# Altium PCB AHD PCB R2.4.PcbDoc (part 1 of 2)
Units mil, origin at the board's own origin, x right, y up, seen from the top; angles counter-clockwise.
Board outline 4500 x 2100 mil, 4 copper layers (Top Layer Signals, Ground Plane, Power Plane, Bottom Layer Signals); 162 components, 142 nets, 631 pads, 242 vias.
Unrouted connection lines stored in the file: 1.
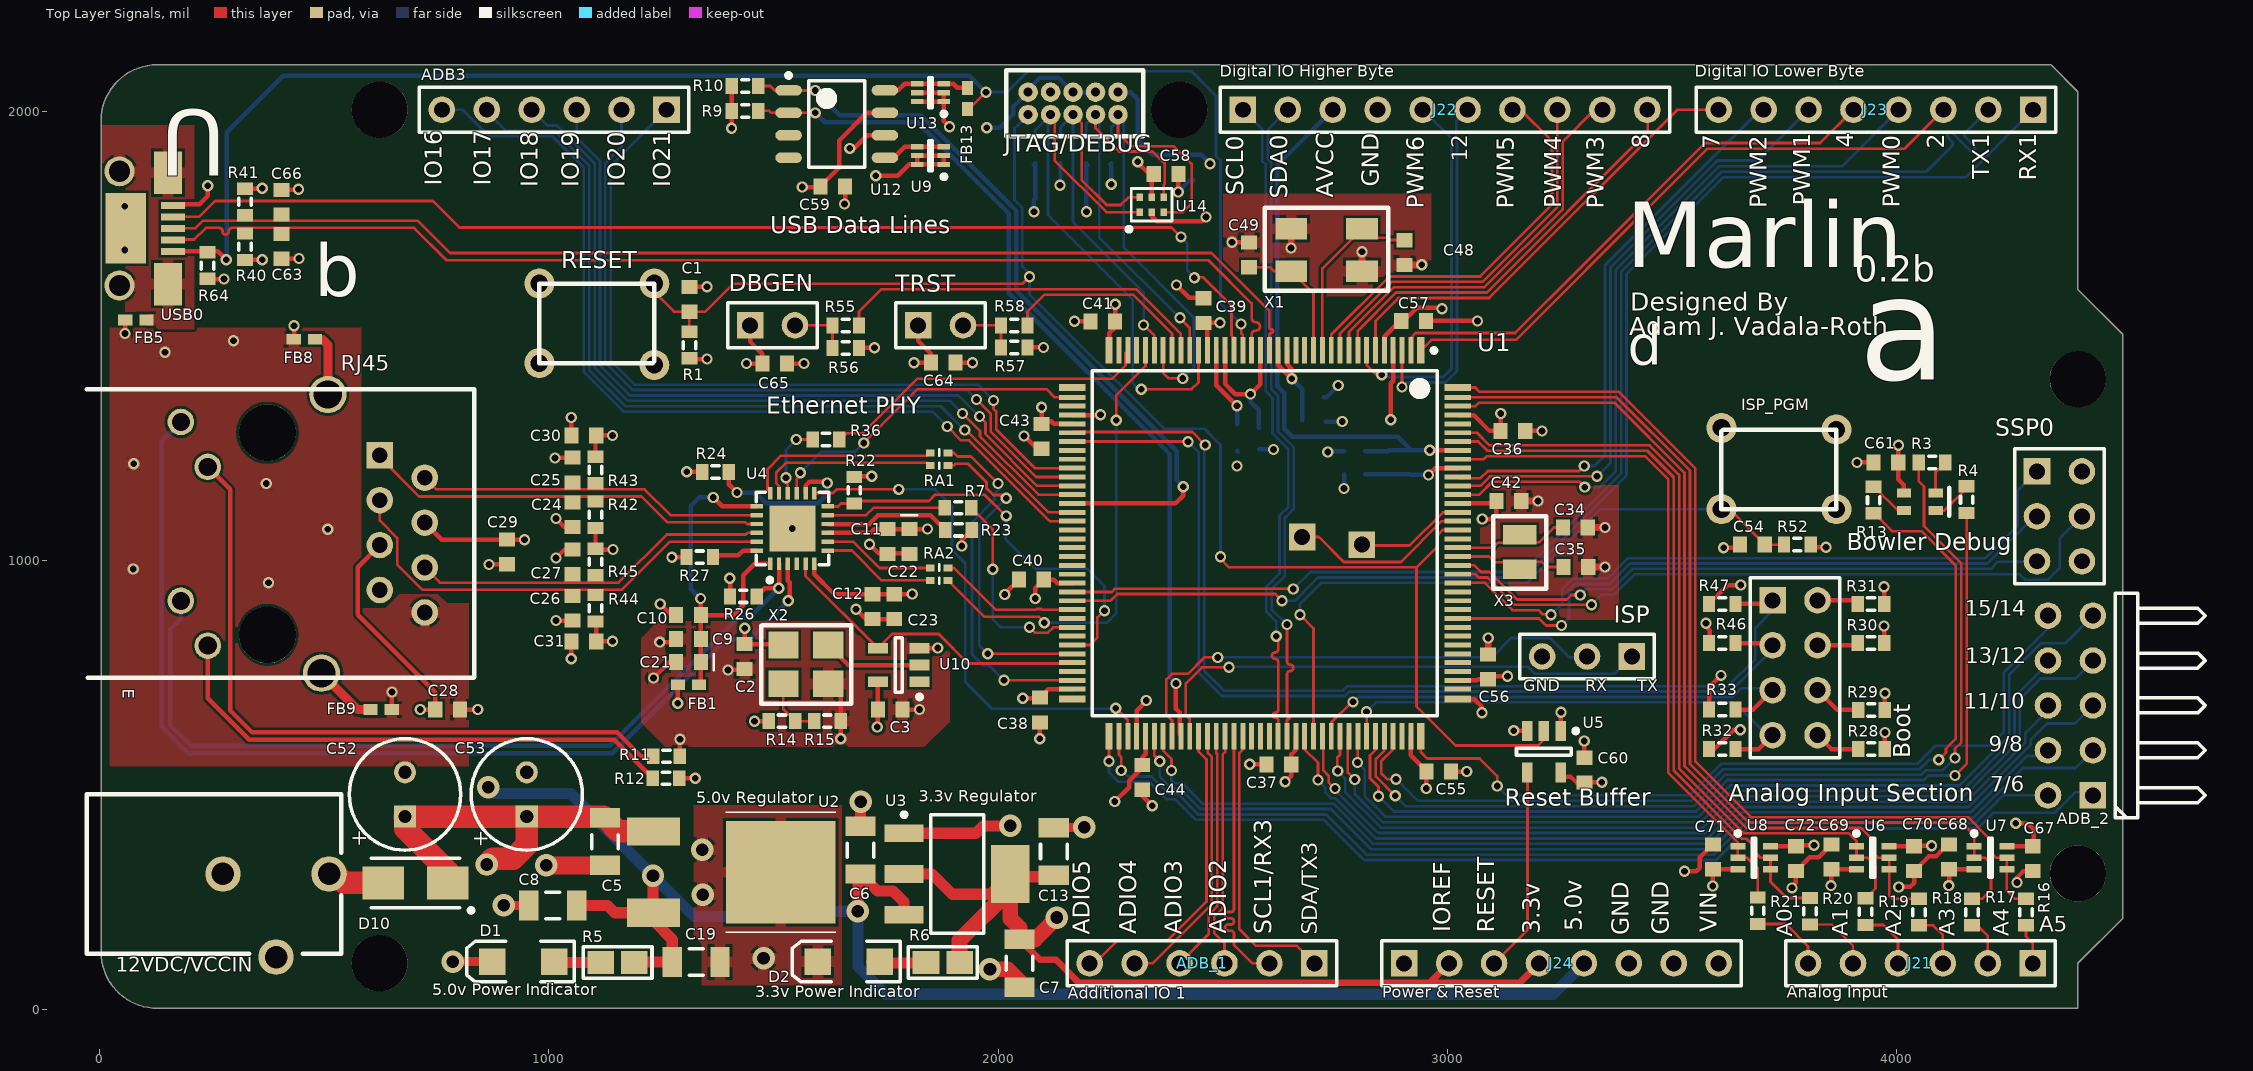
[diagram p0: Top Layer Signals view]
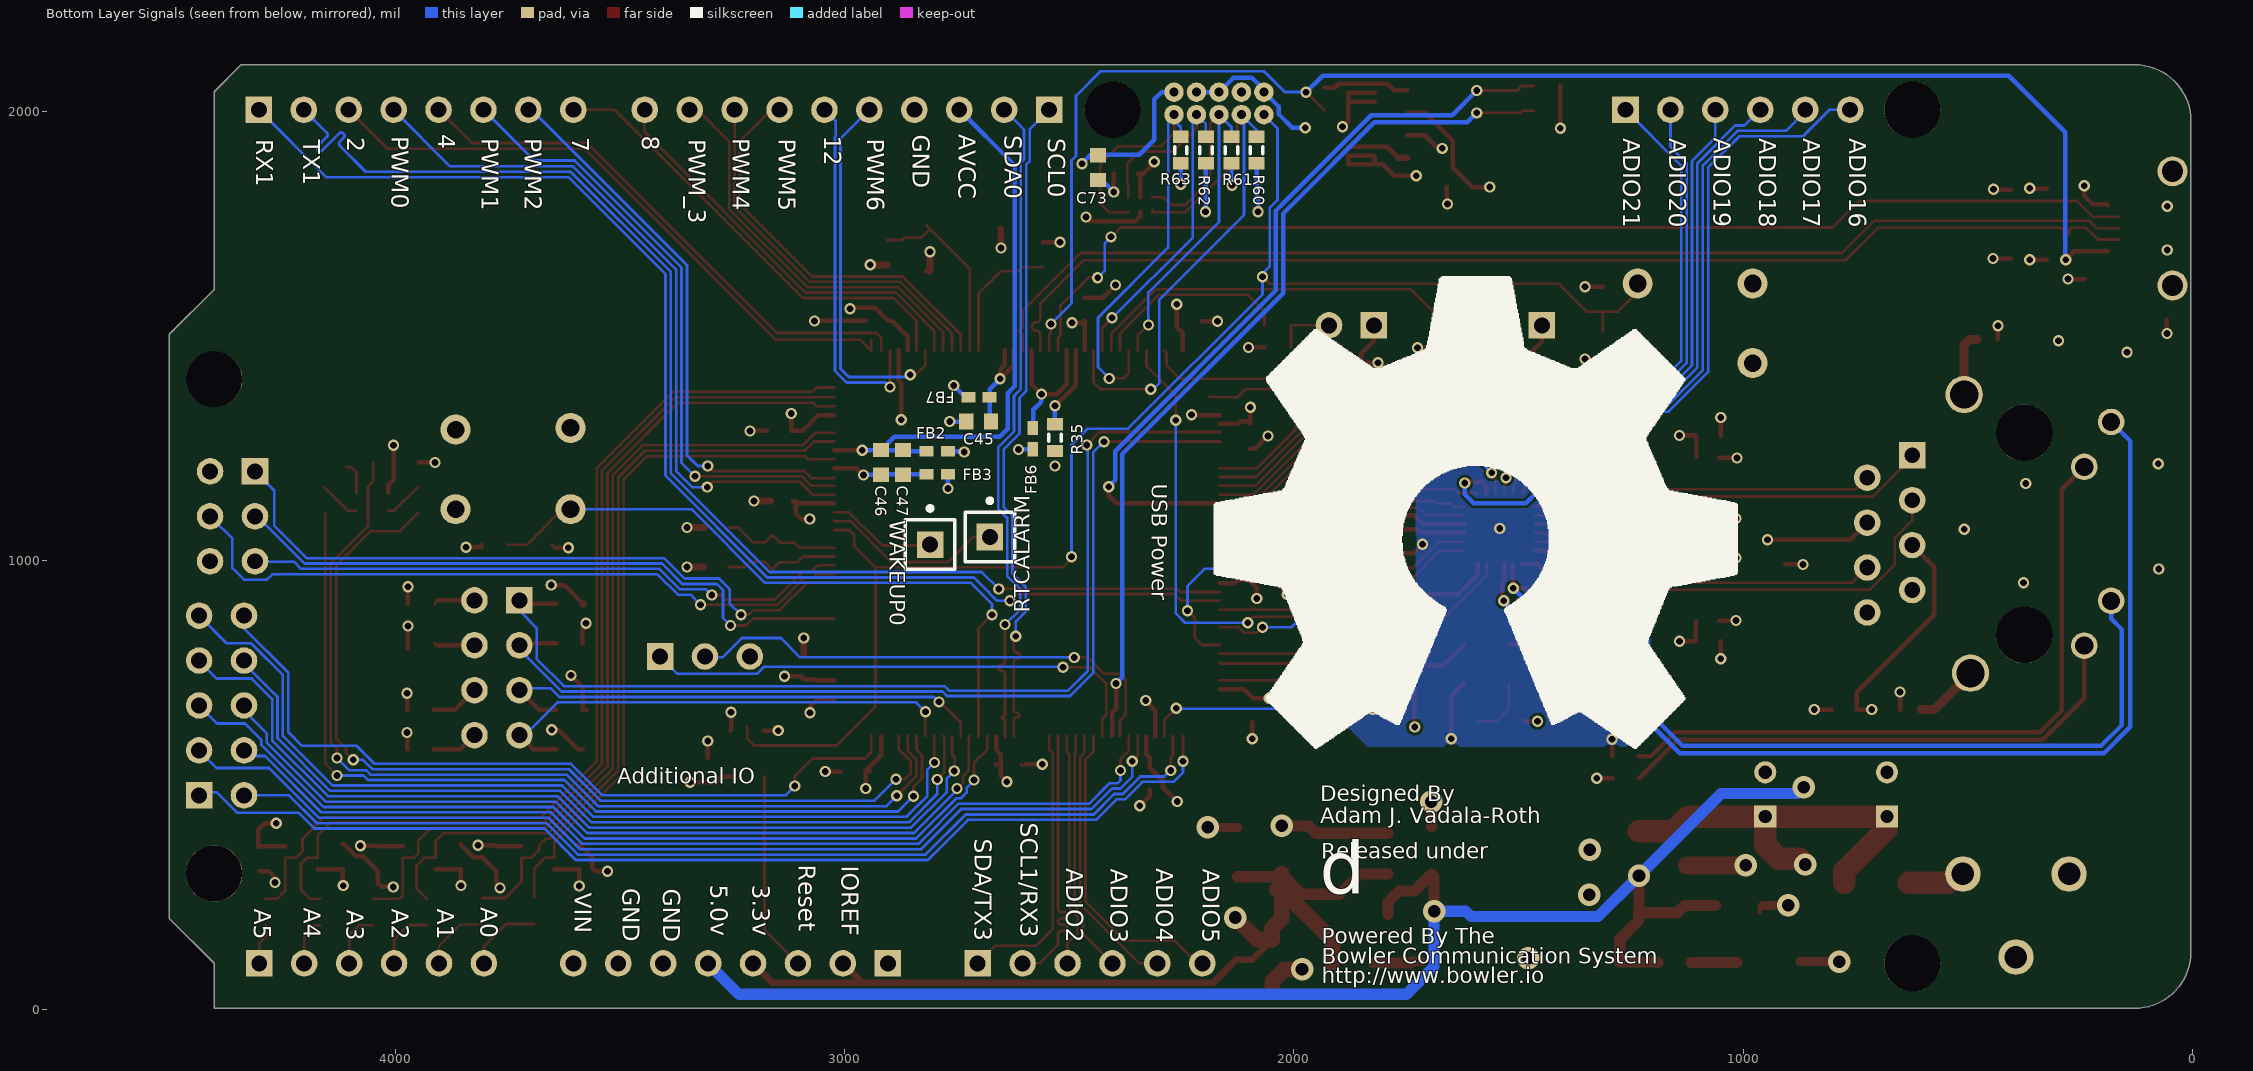
[diagram p1: Bottom Layer Signals view, seen from below]
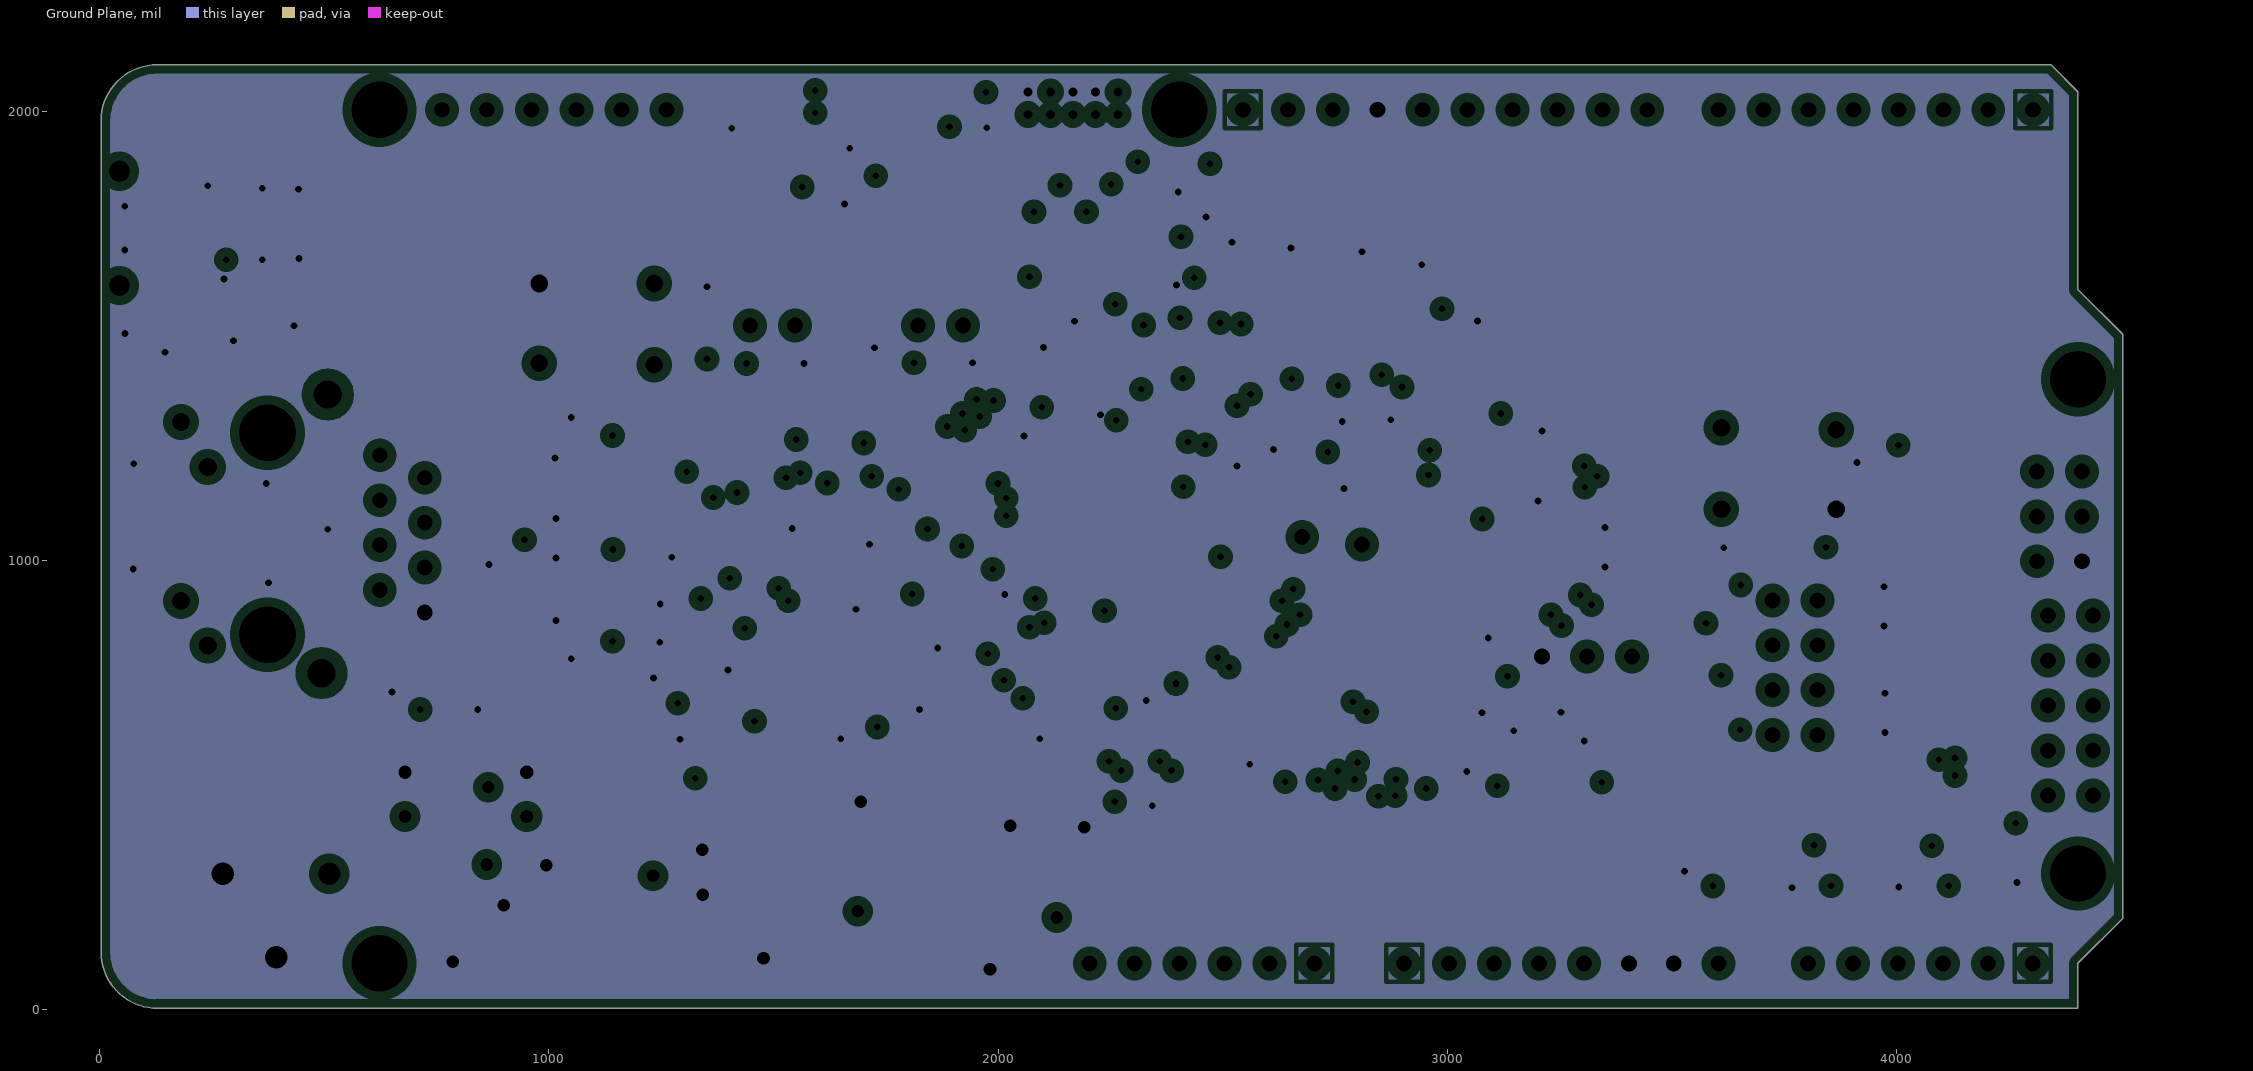
[diagram p2: Ground Plane, clearances drawn from the general rule]
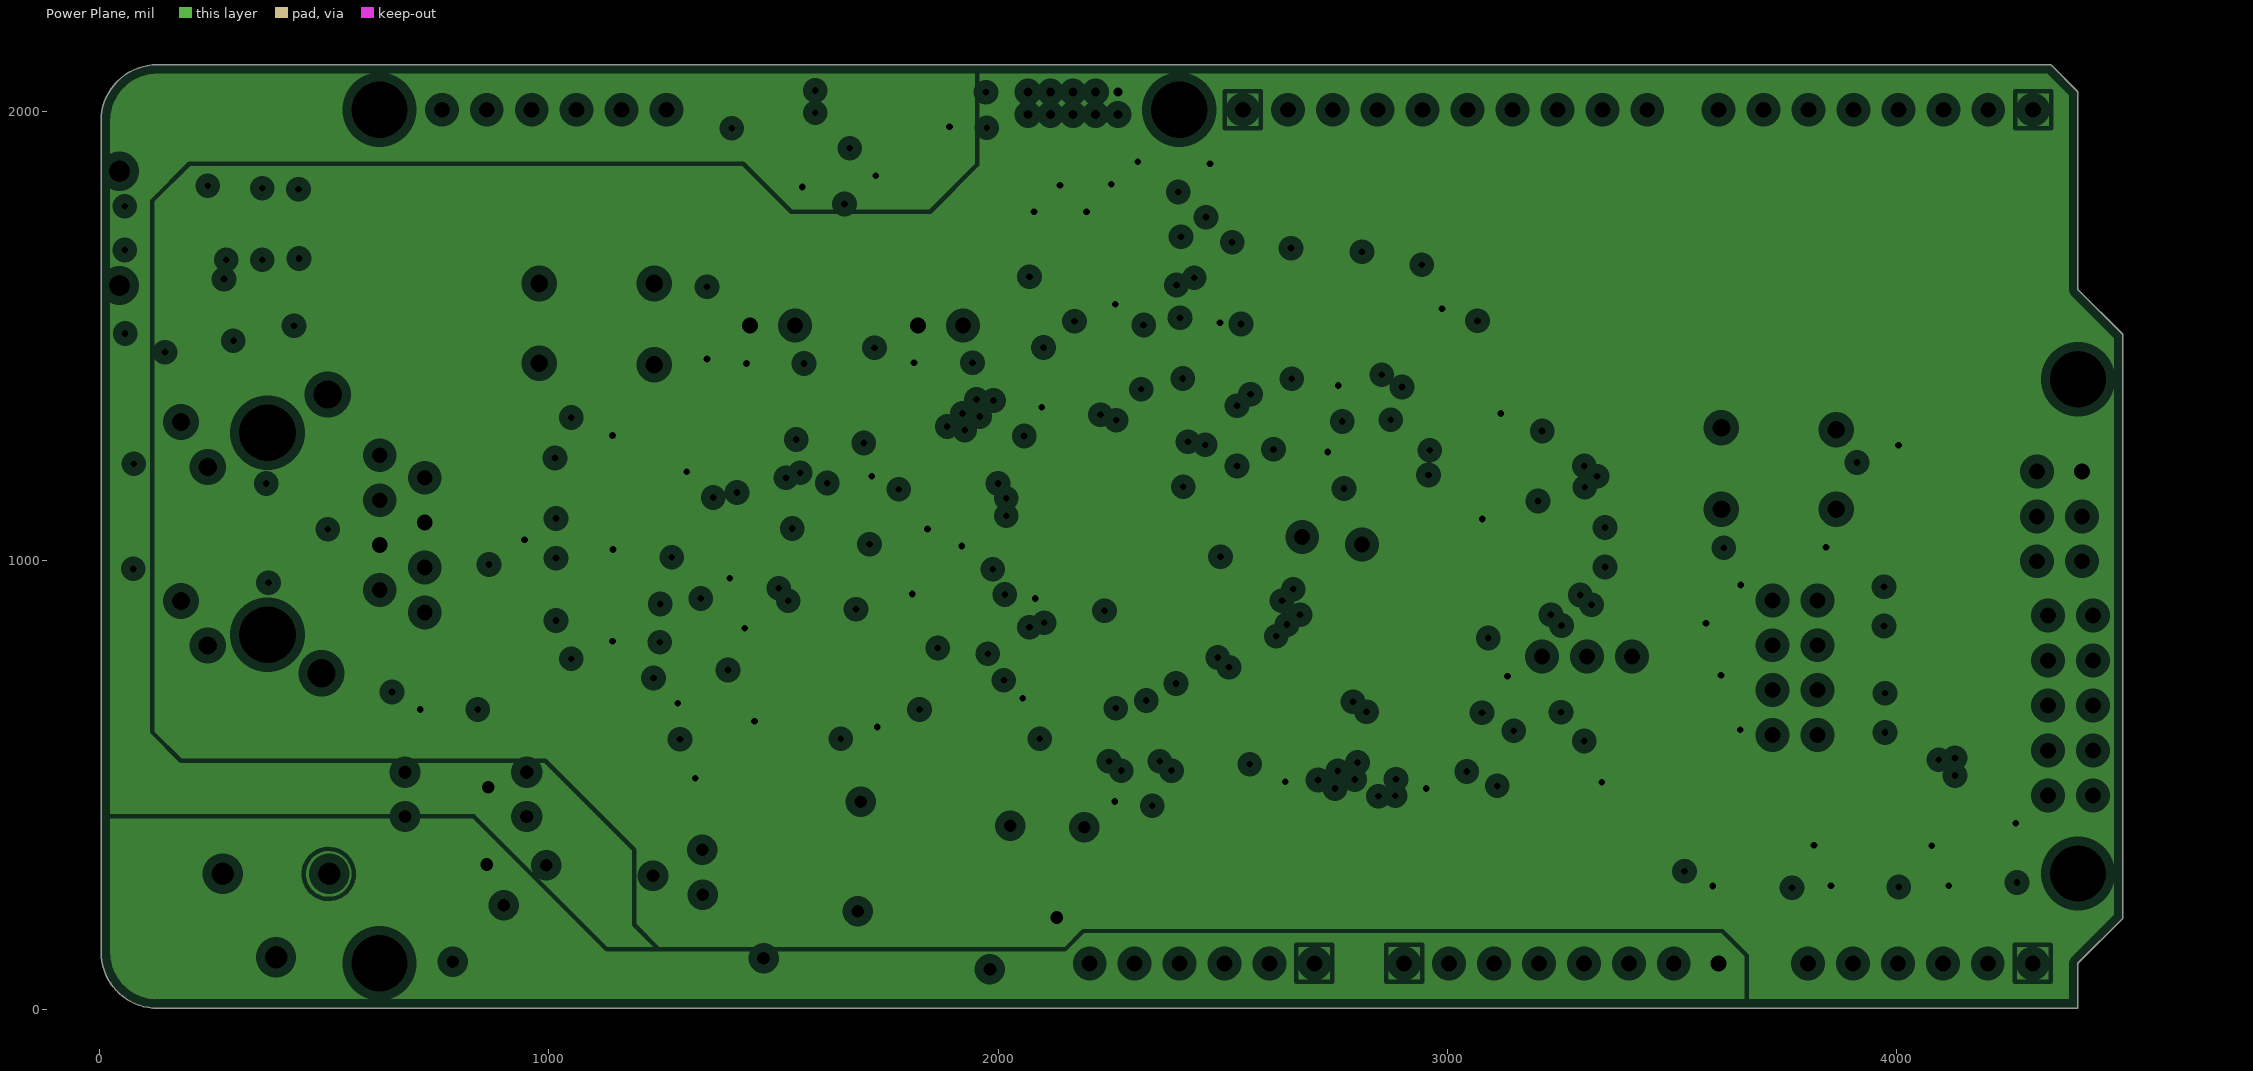
[diagram p3: Power Plane, clearances drawn from the general rule]

## Layer stack, top to bottom
Top Layer Signals: signal copper 1.4
Dielectric: core 12.6, FR-4, Dk 4.8
Ground Plane: plane copper 1.4, net GND
Dielectric: prepreg 12.6, FR-4, Dk 4.8
Power Plane: plane copper 1.4, net (Multiple Nets)
Dielectric: core 12.6, FR-4, Dk 4.8
Bottom Layer Signals: signal copper 1.4

## Board outline
3.45,128.1 ccw(c128.45,128.1) 128.45,3.1 4403.45,3.1 4403.45,103.1 4503.45,203.1 4503.45,1503.1 4403.45,1603.1 4403.45,2043.1 4343.45,2103.1 128.45,2103.1 ccw(c128.45,1978.1) 3.45,1978.1

## Design rules (kind name [scope] priority, off if disabled: settings)
Clearance [All] p1: gap=6
DiffPairsRouting "RXD To MAC" [(InNet('ENET_RXD0') OR InNet('ENET_RXD1'))] p1: maxlimit=10 minlimit=10 mostfreqgap=10 maxuncoupledlength=500
DiffPairsRouting "USB0 Differential Pair" [(InNet('USB0_DM') AND InNet('USB0__DP'))] p2: maxlimit=10 minlimit=10 mostfreqgap=10 maxuncoupledlength=500
DiffPairsRouting [All] p3: maxlimit=10 minlimit=10 mostfreqgap=10 maxuncoupledlength=500
HoleSize [All] p1: absolutevalues=TRUE maxlimit=100 minlimit=15 maxpercent=80.000 minpercent=20.000
MatchedLengths ISP_U0 [(InNet('FDTI_TX') OR InNet('FTDI_RX'))] p1: tolerance=0 checknetsindiffpair=TRUE checkdiffpairvsdiffpair=TRUE checkothers=TRUE
MatchedLengths Arduino_UTXRX [(InNet('GPIO1_6_TXD') OR InNet('GPIO1_7_RXD'))] p2: tolerance=0 checknetsindiffpair=TRUE checkdiffpairvsdiffpair=TRUE checkothers=TRUE
MatchedLengths I2C0 [(InNet('A4_SDA') OR InNet('A5_SCL'))] p3: tolerance=0 checknetsindiffpair=TRUE checkdiffpairvsdiffpair=TRUE checkothers=TRUE
MatchedLengths I2C_1_U3 [(InNet('ADD_0') OR InNet('ADD_1'))] p4: tolerance=0 checknetsindiffpair=TRUE checkdiffpairvsdiffpair=TRUE checkothers=TRUE
MatchedLengths ENET_TX [(InNet('ENET_TXD0') OR InNet('ENET_TXD1'))] p5: tolerance=0 checknetsindiffpair=TRUE checkdiffpairvsdiffpair=TRUE checkothers=TRUE // ENET Mac TX
MatchedLengths ENET_RX [(InNet('ENET_RXD0') OR InNet('ENET_RXD1'))] p6: tolerance=0 checknetsindiffpair=TRUE checkdiffpairvsdiffpair=TRUE checkothers=TRUE // ENET Mac RX
MatchedLengths USB0 [(InNet('USB0_P') OR InNet('USB0_N'))] p7: tolerance=0 checknetsindiffpair=TRUE checkdiffpairvsdiffpair=TRUE checkothers=TRUE // USB0 DP and DM
ParallelSegment [(InNet('USB0_DM') OR InNet('USB0_VBUS') OR InNet('USB0__DP') OR InNet('USB0__ID'))] p1: limit=10000 gap=10
PlaneClearance [All] p1: clearance=20
PlaneConnect PlaneConnect_3 [(InNet('VCC_3.3V') AND InComponent('TRST'))] p1: planeconnectstyle=NoConnect reliefexpansion=20 reliefentries=4 reliefconductorwidth=10 reliefairgap=10
PlaneConnect PlaneConnect_2 [(InNet('VCC_3.3V') AND InComponent('DBGEN'))] p2: planeconnectstyle=NoConnect reliefexpansion=20 reliefentries=4 reliefconductorwidth=10 reliefairgap=10
PlaneConnect PlaneConnect_1 [(InNet('VCC_3.3V') AND InComponent('RJ45'))] p3: planeconnectstyle=NoConnect reliefexpansion=20 reliefentries=4 reliefconductorwidth=10 reliefairgap=10
PlaneConnect VCC5V [InNet('VCC_5V')] p4: planeconnectstyle=Relief reliefexpansion=20 reliefentries=4 reliefconductorwidth=25 reliefairgap=10
PlaneConnect VCCIN [InNet('VCC_IN')] p5: planeconnectstyle=Relief reliefexpansion=20 reliefentries=4 reliefconductorwidth=25 reliefairgap=10
PlaneConnect "JTAG VCC3.3" [(InNet('VCC_3.3V') AND InComponent('JTAG/DEBUG'))] p6: planeconnectstyle=NoConnect reliefexpansion=20 reliefentries=2 reliefconductorwidth=50 reliefairgap=0
PlaneConnect "JTAG GND" [(InNet('GND') AND InComponent('JTAG/DEBUG'))] p7: planeconnectstyle=NoConnect reliefexpansion=20 reliefentries=4 reliefconductorwidth=10 reliefairgap=10
PlaneConnect [All] p8: planeconnectstyle=Relief reliefexpansion=20 reliefentries=4 reliefconductorwidth=15 reliefairgap=10
PolygonConnect [All] p1: connectstyle=Relief reliefconductorwidth=25 reliefentries=4 polygonreliefangle="90 Angle" airgapwidth=10
RoutingVias [All] p1: holewidth=10 width=15 viastyle="Through Hole" minholewidth=10 minwidth=15 maxholewidth=10 maxwidth=15
SilkToSolderMaskClearance SilkscreenOverComponentPads [IsPad] p1: minsilkscreentomaskgap=10 clearancetoexposedcopper=TRUE
SolderMaskExpansion [All] p1: expansion=4
Width [All] p1 off: maxlimit=6 minlimit=6 preferedwidth=6
23 further rules are at their usual default settings.

## Classes and differential pairs
component class "Arduino Header Breakout": C60 C67 C68 C69 C70 C71 C72 J21 J22 J23 J24 R16 R17 R18 R19 R20 R21 SSP0 U5 U6 U7 U8
component class "Bowler Debug LED": "Bowler Debug" "Bowler Status" C61 R3 R4 R13
component class "Crystal / Reset / Boot": Boot "Boot Mode" C1 C34 C35 C48 C49 C58 C64 C65 C73 DBGEN JTAG/DEBUG P16 R1 R28 R29 R30 R31 R32 R33 R46 R47 R55 R56 R57 R58 R60 R61 R62 R63 Reset RTCALARM TRST U14 WAKEUP0 X1 X3
component class Ethernet: C2 C3 C9 C10 C11 C12 C21 C22 C23 C24 C25 C26 C27 C28 C29 C30 C31 FB1 FB8 FB9 R7 R11 R12 R14 R15 R22 R23 R24 R26 R27 R36 R42 R43 R44 R45 RA1 RA2 RJ45 U4 U10 X2
component class "Power Electronics": 12VDC/VCCIN C5 C6 C7 C8 C13 C19 C46 C47 C52 C53 D1 D2 D10 FB2 FB3 J14 R5 R6 U2 U3
component class "USB Section": C45 C59 C63 C66 FB5 FB6 FB7 FB13 R9 R10 R35 R40 R41 R64 Text U9 U12 U13 USB0
component class "Main Controller LPC4330FBD144": ADB3 C36 C37 C38 C39 C40 C41 C42 C43 C44 C54 C55 C56 C57 ISP "ISP TX RX" ISP_PGM R52 U1
component class "Additional Breakout Headers": ADB_1 ADB_2
differential pair RX: +RX_P -RX_N
differential pair TX: +TX_P -TX_N
differential pair ENET_RXD: +ENET_RXD_P -ENET_RXD_N
differential pair ENET_TXD: +ENET_TXD_P -ENET_TXD_N
differential pair RA1: +RA1_P -RA1_N
differential pair RA2: +RA2_P -RA2_N
differential pair USB0: +USB0_P -USB0_N

## Components (designator, comment, footprint, x,y, rotation, side; value= is the part's Value field where it differs from the comment)
12VDC/VCCIN "Center-positive 2.1 mm power jack" PJ-102AH 511,302 r90 top (schematic designator J14)
ADB3 "Header 6" HDR1X6 1262,2003 r180 top locked
ADB_1 "Header 6" HDR1X6 2704,103 r180 top locked
ADB_2 "Header 5X2H" HDR2X5H 4437,477 r90 top locked
Boot "Header 4X2" HDR2X4 3724,911 r270 top
"Bowler Debug" "APTF1616SEEZGQBDC" "RGB LED APTF1616SEEZGQBDC" 4087,1150 r180 top (schematic designator D4)
C1 "Cap Semi" CAPC1608L 1313,1581 r270 top
C2 "Cap Semi" 1608[0603] 1436,786 r90 top
C3 "Cap Semi" 1608[0603] 1760,668 r180 top
C5 "Cap Semi" C1206 1125,374 r90 top
C6 "Cap Semi" C1206 1694,355 r270 top
C7 "Cap Semi" C1206 2048,103 r90 top
C8 "Cap Semi" C1206 1009,232 r0 top
C9 "Cap Semi" 1608[0603] 1311,825 r0 top
C10 "Cap Semi" 1608[0603] 1311,878 r0 top
C11 "Cap Semi" 1608[0603] 1754,1042 r90 top
C12 "Cap Semi" 1608[0603] 1720.28,897 r90 top
C13 "Cap Semi" C1206 2124,352 r270 top
C19 "Cap Semi" C1206 1328,106 r180 top
C21 "Cap Pol3" CAPC1608L 1311,774 r180 top
C22 "Cap Pol3" CAPC1608L 1803,1042 r270 top
C23 "Cap Semi" 1608[0603] 1769,897 r90 top
C24 "Cap Semi" 1608[0603] 1053,1101.47 r90 top
C25 "Cap Semi" 1608[0603] 1053,1201 r270 top
C26 "Cap Semi" 1608[0603] 1053,893.47 r90 top
C27 "Cap Semi" 1608[0603] 1053,996.47 r270 top
C28 "Cap Semi" 1608[0603] 775,668 r180 top
C29 "Cap Semi" 1608[0603] 907,1019 r90 top
C30 "Cap Semi" 1608[0603] 1078,1277.47 r0 top
C31 "Cap Semi" 1608[0603] 1078,819.47 r0 top
C34 "Cap Semi" 1608[0603] 3285,1073 r180 top
C35 "Cap Semi" 1608[0603] 3286,985 r180 top
C36 "Cap Semi" 1608[0603] 3146,1288 r0 top
C37 "Cap Semi" 1608[0603] 2625,546 r180 top
C38 "Cap Semi" 1608[0603] 2093,667 r270 top
C39 "Cap Semi" 1608[0603] 2457,1556 r270 top
C40 "Cap Semi" 1608[0603] 2074,957 r180 top
C41 "Cap Semi" 1608[0603] 2233,1532 r0 top
C42 "Cap Semi" 1608[0603] 3137,1132 r0 top
C43 "Cap Semi" 1608[0603] 2097,1276 r270 top
C44 "Cap Semi" 1608[0603] 2321,517 r270 top
C45 "Cap Semi" CAPC1608L 2702,1309 r0 bottom
C46 "Cap Semi" 1608[0603] 2919,1218 r270 bottom
C47 "Cap Semi" 1608[0603] 2870,1218 r270 bottom
C48 "Cap Semi" 1608[0603] 2905,1685 r90 top
C49 "Cap Semi" 1608[0603] 2559,1680 r90 top
C52 "Cap Pol1" CAPPR2.5-6.3x5 680,479 r90 top
C53 "Cap Pol1" CAPPR2.5-6.3x5 951,479 r90 top
C54 "Cap Semi" CAPC1608L 3679,1035 r0 top
C55 "Cap Semi" 1608[0603] 2981,530 r0 top
C56 "Cap Semi" 1608[0603] 3091,763 r90 top
C57 "Cap Semi" 1608[0603] 2925,1533 r0 top
C58 "Cap Semi" CAPC1608L 2374,1860 r180 top
C59 "Cap Semi" CAPC1608L 1632,1832 r0 top
C60 "Cap Semi" 1608[0603] 3305,533 r90 top
C61 "Cap Semi" CAPC1608L 3976,1218 r0 top
C63 "Cap Semi" CAPC1608L 405,1699 r270 top
C64 "Cap Semi" CAPC1608L 1878,1440 r180 top
C65 "Cap Semi" CAPC1608L 1503,1438 r180 top
C66 "Cap Semi" CAPC1608L 405,1797 r90 top
C67 "Cap Semi" 1608[0603] 4303,336 r270 top locked
C68 "Cap Semi" 1608[0603] 4117,340 r90 top locked
C69 "Cap Semi" 1608[0603] 3855,340 r90 top locked
C70 "Cap Semi" 1608[0603] 4039,336 r270 top locked
C71 "Cap Semi" 1608[0603] 3591,340 r90 top locked
C72 "Cap Semi" 1608[0603] 3776,336 r270 top locked
C73 "Cap Semi" CAPC1608L 2436,1874 r270 bottom
D1 "LED2" 3.2X1.6X1.1 943,107 r180 top
D2 "LED2" 3.2X1.6X1.1 1668,107 r180 top
D10 "PMEG4050EP" PMEG4050EP 703,282 r180 top
DBGEN "Header 2" HDR1X2 1448,1523 r0 top locked
FB1 "BLM18PG121SN1D" BLM18PG121SN1D 1311,723 r0 top
FB2 "BLM15HG601SN1D" BLM18PG121SN1D 2794,1243 r0 bottom
FB3 "BLM15HG601SN1D" BLM18PG121SN1D 2794,1192 r0 bottom
FB5 "BLM15HG601SN1D" BLM18PG121SN1D 81,1535 r0 top
FB6 "BLM15HG601SN1D" BLM18PG121SN1D 2581,1271 r270 bottom
FB7 "BLM15HG601SN1D" BLM18PG121SN1D 2701,1363 r180 bottom
FB8 "BLM15HG601SN1D" BLM18PG121SN1D 456,1492 r0 top
FB9 "BLM15HG601SN1D" BLM18PG121SN1D 627,668 r180 top
FB13 "BLM15HG601SN1D" BLM18PG121SN1D 1932,2028 r270 top
ISP "Header 3" HDR1X3 3411,786 r180 top
ISP_PGM "MINI-MTRY-SWTCH" "Momentary Switch" 3866,1291 r180 top
J21 "ARDUINO_ANALOG_IN" HDR1X6 4303,103 r180 top locked
J22 "Header 10" HDR1X10 2545,2003 r0 top locked
J23 "ARDUINO_DIGITAL_LOW_BYTE" HDR1X8 4304,2003 r180 top locked
J24 "Header 8" HDR1X8 2904,103 r0 top locked
JTAG/DEBUG "S9015E-05-ND" S9015E-05-ND 2067,2042 r0 top locked
R1 "Res3" J1-0603 1313,1479 r270 top
R3 "Res3" J1-0603 4079,1218 r0 top
R4 "Res3" J1-0603 4156,1135 r270 top
R5 "Res3" "0805 SMD Resistor" 1153,105 r0 top
R6 "Res3" "0805 SMD Resistor" 1877,105 r0 top
R7 "Res3" J1-0603 1911,1117 r0 top
R9 "Res3" J1-0603 1437,2000 r0 top
R10 "Res3" J1-0603 1437,2056 r0 top
R11 "Res3" J1-0603 1262,564 r180 top
R12 "Res3" J1-0603 1261,515 r180 top
R13 "Res3" J1-0603 3949,1134 r270 top
R14 "Res3" J1-0603 1519,642 r180 top
R15 "Res3" J1-0603 1620,642 r180 top
R16 "Res3" J1-0603 4288,217 r270 top locked
R17 "Res3" J1-0603 4168,217 r270 top locked
R18 "Res3" J1-0603 4050,217 r270 top locked
R19 "Res3" J1-0603 3931,218 r270 top locked
R20 "Res3" J1-0603 3807,219 r270 top locked
R21 "Res3" J1-0603 3691,220 r270 top locked
R22 "Res3" J1-0603 1680,1156 r90 top
R23 "Res3" J1-0603 1912,1068 r0 top
R24 "Res3" J1-0603 1371,1197 r0 top
R26 "Res3" J1-0603 1433,920 r0 top
R27 "Res3" J1-0603 1336,1007 r0 top
R28 "Res3" J1-0603 3944,580 r180 top
R29 "Res3" J1-0603 3944,667 r180 top
R30 "Res3" J1-0603 3943,816 r180 top
R31 "Res3" J1-0603 3943,903 r180 top
R32 "Res3" J1-0603 3612,580 r0 top
R33 "Res3" J1-0603 3612,668 r0 top
R35 "Res3" RESC1608L 2532,1273 r90 bottom
R36 "Res3" J1-0603 1617,1269 r0 top
R40 "Res3" J1-0603 324,1698 r90 top
R41 "Res3" J1-0603 324,1798 r270 top
R42 "Res3" J1-0603 1104,1101.47 r270 top
R43 "Res3" J1-0603 1104,1201 r90 top
R44 "Res3" J1-0603 1104,893.47 r270 top
R45 "Res3" J1-0603 1104,996.47 r90 top
R46 "Res3" J1-0603 3612,816 r0 top
R47 "Res3" J1-0603 3612,903 r0 top
R52 "Res3" J1-0603 3779,1035 r0 top
R55 "Res3" J1-0603 1661,1523 r180 top
R56 "Res3" J1-0603 1661,1473 r180 top
R57 "Res3" J1-0603 2036,1474 r180 top
R58 "Res3" J1-0603 2036,1523 r180 top
R60 "Res3" J1-0603 2083,1913 r90 bottom
R61 "Res3" J1-0603 2139,1913 r90 bottom
R62 "Res3" J1-0603 2196,1913 r90 bottom
R63 "Res3" J1-0603 2252,1913 r90 bottom
R64 "Res3" J1-0603 240,1656 r90 top
RA1 "EXB24V" "EXB24V - Res Array x2" 1888.5,1239 r270 top locked
RA2 "EXB24V" "EXB24V - Res Array x2" 1888.5,983 r270 top locked
RESET "MINI-MTRY-SWTCH" "Momentary Switch" 979,1439 r0 top (schematic designator SW1)
RJ45 "Pulse RJ45 Jack" J0006D21BNL 724,884 r90 top
RTCALARM "Socket" PIN1 2677,1052 r180 bottom (schematic designator TP2)
SSP0 "Header 3X2" HDR2X3 4312.55,1198 r270 top
TRST "Header 2" HDR1X2 1822,1523 r0 top locked (schematic designator TP3)
U1 "LPC4330FBD144" SOT486-1_V 2594,1038 r270 top locked
U2 "VOLT REG" DPAK-3 1233,306 r270 top
U3 "NX1117CE33Z" NX1117CE33Z 1909,302 r0 top
U4 "LAN8720_QFN" LAN8720_QFN 1542,1071 r90 top
U5 "74LVC1G125-Q100" 74LVC1G125-Q100 3215,574 r270 top
U6 "BAV70S SOT-363" BAV70S_SOT363 3947,338 r0 top locked
U7 "BAV70S SOT-363" BAV70S_SOT363 4209,338 r0 top locked
U8 "BAV70S SOT-363" BAV70S_SOT363 3683,338 r0 top locked
U9 "PMEG2005AEV115" PMEG2005AEV115 1850,1901 r180 top
U10 "74LVC1G17" 74LVC1G17 1779,767 r180 top
U12 "LM3526-H" LM3526 1641,1971 r0 top
U13 "PMEG2005AEV115" PMEG2005AEV115 1850,2041 r180 top
U14 "IP4221CZ6-S" IP4221CZ6-S 2315,1808 r270 top (schematic designator EDS1)
USB0 "DX4R005J91R5100" "Micro USB Circular Holes Only" 5,1738 r270 top
WAKEUP0 "Socket" PIN1 2810,1035 r180 bottom (schematic designator TP1)
X1 "ABM3B-12.000MHZ-B2-T" ABM3B-12.000MHZ-B2-T 2810,1738 r180 top locked
X2 "ASFL1-50MHZ-L-T" ASFL1-50MHZ-L-T 1522,725 r0 top
X3 "ABS07-32.768KHZ-T" ABS07-32.768KHZ-T 3161,980 r90 top

## Footprints (in the part's own frame and the unit in brackets; to place one, negate y for a bottom-side part, rotate by r counter-clockwise, add the part's x,y. Pads: shape width x height; smd on the part's side, far side on the other; paste and mask are expansions set on the pad)
3.2X1.6X1.1 [mm] "SMT LED; 2 Flat Leads"
  rect 1.5x1.5 smd: 1(-1.75,0) 2(1.75,0)
  silkscreen extent -2.9,-1.15 3.2,1.15
74LVC1G17 [mm]
  rect 1.15x0.6 smd: 1(-1.175,0.95) 2(-1.175,0) 3(-1.175,-0.95) 4(1.175,-0.95) 5(1.175,0.95)
  silkscreen extent -1.3,-1.55 0.2,1.92, body extent -0.85,-1.55 0.85,1.55, height 1.1
74LVC1G125-Q100 [mm] "Line Driver Buffer"
  rect 1.15x0.6 smd: 1(-1.175,0.95) 2(-1.175,0) 3(-1.175,-0.95) 4(1.175,-0.95) 5(1.175,0.95)
  silkscreen extent -1.3,-1.55 0.2,1.93, body extent -0.85,-1.55 0.85,1.55, height 1.1
"0805 SMD Resistor" [mm]
  rect 1.5x1.3 smd: 1(-0.95,0) 2(0.95,0)
  silkscreen extent -1.95,-0.9 1.95,0.9
1608[0603] [mm] "Chip Capacitor, Body 1.6x0.8mm, IPC High Density"
  rect 0.8x0.9 smd: 1(-0.7,0) 2(0.7,0)
  body extent -0.87,-0.48 0.87,0.48, height 1.3
ABM3B-12.000MHZ-B2-T [mm] "ABM3B-12.000MHZ-B2-T 12MHZ Crystam Oscillator"
  rect 1.8x1.2 smd: 1(0,0) 2(4,0) 3(4,2.4) 4(0,2.4)
  silkscreen extent -1.5,-1.2 5.5,3.5
ABS07-32.768KHZ-T [mm] "ABS07-32.768KHZ-T Crystal Oscillator"
  rect 1.1x1.9 smd: 1(0,0) 2(1.95,0)
  silkscreen extent -1.1,-1.5 3,1.5
ASFL1-50MHZ-L-T [mm] "Abracon ASFL1-50MHZ-L-T 50MHZ Crystal Oscillator"
  rect 1.7x1.5 smd: 1(0,0) 2(2.54,0) 3(2.54,2.2) 4(0,2.2)
  silkscreen extent -1.25,-1.13 3.85,3.33
BAV70S_SOT363 [mm] "SOT23, 6-Leads, Body 2.2x2.2mm (max), Pitch 0.65mm, IPC Medium Density"
  rect 0.85x0.35 smd: 1(-0.925,0.65) 2(-0.925,0) 3(-0.925,-0.65) 4(0.925,-0.65) 5(0.925,0) 6(0.925,0.65)
  silkscreen extent -1.05,-1.1 0.1,1.5, body extent -0.67,-1.1 0.67,1.1, height 1.1
BLM18PG121SN1D [mm] "Chip Inductor, 2-Leads, Body 1.0x0.5mm, IPC Medium Density"
  rect 0.8x0.6 smd: 1(-0.6,0) 2(0.6,0)
  body extent -0.52,-0.28 0.53,0.27, height 0.6
C1206 [mm] "Chip Capacitor, Body 3.2x1.6mm, IPC High Density"
  rect 1.1x1.7 smd: 1(-1.35,0) 2(1.35,0)
  silkscreen extent -0.4,-0.75 0.4,0.75, body extent -1.7,-0.9 1.7,0.9, height 1.3
CAPC1608L [mm] "Chip Capacitor, Body 1.6x0.8mm, IPC High Density"
  rect 0.8x0.9 smd: 1(-0.7,0) 2(0.7,0)
  body extent -0.87,-0.48 0.87,0.48, height 0.85
CAPPR2.5-6.3x5 [mm] "Capacitor, Electrolytic, Radial; Body 6.3 x 5 mm (Dia.xH typ); Pin Spacing 2.5 mm (typ)"
  rect 1.25x1.25 hole 0.75: 1(-1.25,0)
  round 1.25 hole 0.75: 2(1.25,0)
  silkscreen extent -3.15,-3.15 3.15,3.15
DPAK-3 [mm] "Case 369C-01 for MC78xx regulators"
  rect 1.6x3 smd: 1(-2.3,0) 3(2.3,0)
  rect 5.8x6.2 smd: 2(0,7.2)
  silkscreen extent -3.4,4.1 3.4,10.3, body extent -3.4,4.1 3.4,10.3, height 2.38
"EXB24V - Res Array x2" [mm] "Panasonic Resistor Array"
  rect 0.4x0.5 smd: 1(0,0) 2(0,-1) 3(0.7,0) 4(0.7,-1)
  silkscreen extent -0.2,-0.5 0.9,-0.5
HDR1X2 [mm] "Connector; Header; 2 Position"
  rect 1.5x1.5 hole 0.9: 1(0,0)
  round 1.5 hole 0.9: 2(2.54,0)
  silkscreen extent -1.27,-1.27 3.81,1.27
HDR1X3 [mm] "Connector; Header; 3 Position"
  rect 1.5x1.5 hole 0.9: 1(0,0)
  round 1.5 hole 0.9: 2(2.54,0) 3(5.08,0)
  silkscreen extent -1.27,-1.27 6.35,1.27
HDR1X6 [mm] "Connector; Header; 6 Position"
  rect 1.5x1.5 hole 0.9: 1(0,0)
  round 1.5 hole 0.9: 2(2.54,0) 3(5.08,0) 4(7.62,0) 5(10.16,0) 6(12.7,0)
  silkscreen extent -1.27,-1.27 13.97,1.27
HDR1X8 [mm] "Connector; Header; 8 Position"
  rect 1.5x1.5 hole 0.9: 1(0,0)
  round 1.5 hole 0.9: 2(2.54,0) 3(5.08,0) 4(7.62,0) 5(10.16,0) 6(12.7,0) 7(15.24,0) 8(17.78,0)
  silkscreen extent -1.27,-1.27 19.05,1.27
HDR1X10 [mm] "Connector; Header; 10 Position"
  rect 1.5x1.5 hole 0.9: 1(0,0)
  round 1.5 hole 0.9: 2(2.54,0) 3(5.08,0) 4(7.62,0) 5(10.16,0) 6(12.7,0) 7(15.24,0) 8(17.78,0) 9(20.32,0) 10(22.86,0)
  silkscreen extent -1.27,-1.27 24.13,1.27
HDR2X3 [mm] "Connector; Header; 3x2 Position"
  rect 1.5x1.5 hole 0.9: 1(0,0)
  round 1.5 hole 0.9: 2(0,2.54) 3(2.54,0) 4(2.54,2.54) 5(5.08,0) 6(5.08,2.54)
  silkscreen extent -1.27,-1.27 6.35,3.81
HDR2X4 [mm] "Connector; Header; 4x2 Position"
  rect 1.5x1.5 hole 0.9: 1(0,0)
  round 1.5 hole 0.9: 2(0,2.54) 3(2.54,0) 4(2.54,2.54) 5(5.08,0) 6(5.08,2.54) 7(7.62,0) 8(7.62,2.54)
  silkscreen extent -1.27,-1.27 8.89,3.81
HDR2X5H [mm] "Connector; Header; 5x2 Position; Right Angle"
  rect 1.5x1.5 hole 0.9: 1(0,0)
  round 1.5 hole 0.9: 2(0,2.54) 3(2.54,0) 4(2.54,2.54) 5(5.08,0) 6(5.08,2.54) 7(7.62,0) 8(7.62,2.54) 9(10.16,0) 10(10.16,2.54)
  silkscreen extent -1.27,-6.35 11.43,-1.27
IP4221CZ6-S [mm] "ESD Protection IC"
  rect 0.425x0.37 smd: 1(0.837,0) 2(0.837,0.685) 3(0.837,1.37) 4(0,1.37) 5(0,0.685) 6(0,0)
  silkscreen extent -0.5,-0.72 1.92,1.84
J1-0603 [mm] "Chip Resistor, Body 1.6x0.8mm, IPC High Density"
  rect 0.7x0.9 smd: 1(-0.75,0) 2(0.75,0)
  silkscreen extent -0.2,-0.35 0.2,0.35, body extent -0.85,-0.48 0.85,0.48, height 0.9
J0006D21BNL [mm] "RJ45 Integrated Magnetics and LEDs"
  rect 1.5x1.5 hole 0.89: 1(8.89,2.54)
  round 1.5 hole 0.89: 2(7.62,0) 3(6.35,2.54) 4(5.08,0) 5(3.81,2.54) 6(2.54,0) 7(1.27,2.54) 8(0,0)
  round 1.5 hole 1.02: 9(10.77,13.79) 10(8.23,12.27) 11(0.66,13.79) 12(-1.88,12.27)
  round 2.11 hole 1.6: 13(-3.43,5.84) 14(12.32,5.48)
  round 3.2 hole 3.2: ""(-1.27,8.89) ""(10.16,8.89)
LAN8720_QFN [mm] "QFN, 24-Leads, Body 4.1x4.1mm (max), Pitch 0.50mm, IPC Medium Density"
  rect 0.7x0.25 smd: 1(-2,1.25) 2(-2,0.75) 3(-2,0.25) 4(-2,-0.25) 5(-2,-0.75) 6(-2,-1.25) 13(2,-1.25) 14(2,-0.75) 15(2,-0.25) 16(2,0.25) 17(2,0.75) 18(2,1.25)
  rect 0.25x0.7 smd: 7(-1.25,-2) 8(-0.75,-2) 9(-0.25,-2) 10(0.25,-2) 11(0.75,-2) 12(1.25,-2) 19(1.25,2) 20(0.75,2) 21(0.25,2) 22(-0.25,2) 23(-0.75,2) 24(-1.25,2)
  rect 2.6x2.6 smd: 25(0,0)
  silkscreen extent -3.04,-2.05 2.05,2.05, body extent -2.05,-2.05 2.05,2.05, height 1
LM3526 [mm] "TSOP, 8-Leads, Body 4.9x3.9mm (max), Pitch 1.27mm, IPC Medium Density"
  oval 1.5x0.6 smd: 1(-2.725,1.905) 2(-2.725,0.635) 3(-2.725,-0.635) 4(-2.725,-1.905) 5(2.725,-1.905) 6(2.725,-0.635) 7(2.725,0.635) 8(2.725,1.905)
  silkscreen extent -2.85,-2.45 1.58,2.88, body extent -1.95,-2.45 1.95,2.45, height 1.45
"Micro USB Circular Holes Only" [mm]
  rect 0.4x1.35 smd: 1(1.275,4.025) 2(0.625,4.025) 3(-0.025,4.025) 4(-0.675,4.025) 5(-1.325,4.025)
  rect 2.4x1.6 smd: 6(3.125,3.75) 9(-3.175,3.75)
  round 1.7 hole 1.2: 7(3.2,1) 8(-3.25,1)
  rect 4x2.3 smd: GND(-0.025,1.35)
"Momentary Switch" [mm] "Momentary switch for reset"
  round 1.7 hole 1: 1(6.5,-0.1) 2(0,0) 3(6.5,4.5) 4(0,4.5)
  silkscreen extent 0,0 6.5,4.5
NX1117CE33Z [mm] "3.3v linear regulator"
  rect 2.2x1 smd: 1(-3,2.3) 2(-3,0) 3(-3,-2.3)
  rect 2.2x3.3 smd: 4(3,0)
  silkscreen extent -3.12,-3.35 1.5,3.47, body extent -1.85,-3.35 1.85,3.35, height 1.8
PIN1 [mm] "Connector; Plug"
  rect 1.5x1.5 hole 0.9: 1(0,0)
  silkscreen extent -1.4,-1.4 1.4,2.17
PJ-102AH [mm] "Center positive 2.1 mm power jack"
  round 2 hole 1.27: 1(0,0) 2(0,6) 3(-4.7,3)
  silkscreen extent -4.5,-0.7 4.5,13.7, body extent -5.8,-0.7 4.5,13.7, height 11
PMEG2005AEV115 [mm] "SOT23, 6-Leads, Body 1.7x1.7mm (max), Pitch 0.50mm, IPC Medium Density"
  rect 0.7x0.3 smd: 1(-0.75,0.5) 2(-0.75,0) 3(-0.75,-0.5) 4(0.75,-0.5) 5(0.75,0) 6(0.75,0.5)
  silkscreen extent -0.88,-0.85 0.1,1.32, body extent -0.65,-0.85 0.65,0.85, height 0.6
PMEG4050EP [mm] "PMEG4050EP NXP SMD Schottky Diode"
  rect 2.35x1.85 smd: 1(1.825,0) 2(-1.825,0)
  silkscreen extent -3.28,-1.4 2.5,1.67, body extent -2.5,-1.35 2.5,1.35, height 1.1
RESC1608L [mm] "Chip Resistor, Body 1.6x0.8mm, IPC High Density"
  rect 0.7x0.9 smd: 1(-0.75,0) 2(0.75,0)
  silkscreen extent -0.2,-0.35 0.2,0.35, body extent -0.85,-0.48 0.85,0.48, height 0.6
"RGB LED APTF1616SEEZGQBDC" [mm] "RGB LED"
  rect 0.8x0.5 smd: 1(1.8,0) 2(0,0) 3(0,1) 4(1.8,1)
  silkscreen extent -0.77,-0.3 -0.77,1.28
S9015E-05-ND [mm] "10 Pin Cortex JTAG Debug Header"
  round 1.1 hole 0.508: 1(5.08,0) 2(5.08,-1.27) 3(3.81,0) 4(3.81,-1.27) 5(2.54,0) 6(2.54,-1.27) 7(1.27,0) 8(1.27,-1.27) 9(0,0) 10(0,-1.27)
  round 0.5 on Top Overlay: 1(7,0.8)
  silkscreen extent -1.25,-2.5 6.5,1.25
SOT486-1_V [mm] "Thin QFP, 144-Leads, Body 20x20mm, Pitch 0.5mm, NXP Recommended"
  rect 1.5x0.4 smd: 1(-10.9,8.81) 36(-10.9,-8.81) 73(10.9,-8.81) 108(10.9,8.81)
  rect 1.5x0.28 smd: 2(-10.9,8.25) 3(-10.9,7.75) 4(-10.9,7.25) 5(-10.9,6.75) 6(-10.9,6.25) 7(-10.9,5.75) 8(-10.9,5.25) 9(-10.9,4.75) 10(-10.9,4.25) 11(-10.9,3.75) 12(-10.9,3.25) 13(-10.9,2.75) 14(-10.9,2.25) 15(-10.9,1.75) 16(-10.9,1.25) 17(-10.9,0.75) 18(-10.9,0.25) 19(-10.9,-0.25) 20(-10.9,-0.75) 21(-10.9,-1.25) 22(-10.9,-1.75) 23(-10.9,-2.25) 24(-10.9,-2.75) 25(-10.9,-3.25) 26(-10.9,-3.75) 27(-10.9,-4.25) 28(-10.9,-4.75) 29(-10.9,-5.25) 30(-10.9,-5.75) 31(-10.9,-6.25) 32(-10.9,-6.75) 33(-10.9,-7.25) 34(-10.9,-7.75) 35(-10.9,-8.25) 74(10.9,-8.25) 75(10.9,-7.75) 76(10.9,-7.25) 77(10.9,-6.75) 78(10.9,-6.25) 79(10.9,-5.75) 80(10.9,-5.25) 81(10.9,-4.75) 82(10.9,-4.25) 83(10.9,-3.75) 84(10.9,-3.25) 85(10.9,-2.75) 86(10.9,-2.25) 87(10.9,-1.75) 88(10.9,-1.25) 89(10.9,-0.75) 90(10.9,-0.25) 91(10.9,0.25) 92(10.9,0.75) 93(10.9,1.25) 94(10.9,1.75) 95(10.9,2.25) 96(10.9,2.75) 97(10.9,3.25) 98(10.9,3.75) 99(10.9,4.25) 100(10.9,4.75) 101(10.9,5.25) 102(10.9,5.75) 103(10.9,6.25) 104(10.9,6.75) 105(10.9,7.25) 106(10.9,7.75) 107(10.9,8.25)
  rect 0.4x1.5 smd: 37(-8.81,-10.9) 72(8.81,-10.9) 109(8.81,10.9) 144(-8.81,10.9)
  rect 0.28x1.5 smd: 38(-8.25,-10.9) 39(-7.75,-10.9) 40(-7.25,-10.9) 41(-6.75,-10.9) 42(-6.25,-10.9) 43(-5.75,-10.9) 44(-5.25,-10.9) 45(-4.75,-10.9) 46(-4.25,-10.9) 47(-3.75,-10.9) 48(-3.25,-10.9) 49(-2.75,-10.9) 50(-2.25,-10.9) 51(-1.75,-10.9) 52(-1.25,-10.9) 53(-0.75,-10.9) 54(-0.25,-10.9) 55(0.25,-10.9) 56(0.75,-10.9) 57(1.25,-10.9) 58(1.75,-10.9) 59(2.25,-10.9) 60(2.75,-10.9) 61(3.25,-10.9) 62(3.75,-10.9) 63(4.25,-10.9) 64(4.75,-10.9) 65(5.25,-10.9) 66(5.75,-10.9) 67(6.25,-10.9) 68(6.75,-10.9) 69(7.25,-10.9) 70(7.75,-10.9) 71(8.25,-10.9) 110(8.25,10.9) 111(7.75,10.9) 112(7.25,10.9) 113(6.75,10.9) 114(6.25,10.9) 115(5.75,10.9) 116(5.25,10.9) 117(4.75,10.9) 118(4.25,10.9) 119(3.75,10.9) 120(3.25,10.9) 121(2.75,10.9) 122(2.25,10.9) 123(1.75,10.9) 124(1.25,10.9) 125(0.75,10.9) 126(0.25,10.9) 127(-0.25,10.9) 128(-0.75,10.9) 129(-1.25,10.9) 130(-1.75,10.9) 131(-2.25,10.9) 132(-2.75,10.9) 133(-3.25,10.9) 134(-3.75,10.9) 135(-4.25,10.9) 136(-4.75,10.9) 137(-5.25,10.9) 138(-5.75,10.9) 139(-6.25,10.9) 140(-6.75,10.9) 141(-7.25,10.9) 142(-7.75,10.9) 143(-8.25,10.9)
  silkscreen extent -11.02,-9.75 9.75,9.75, body extent -10,-10 10,10, height 1.6

## Part data
12VDC/VCCIN: library part PWR2.5, "Power jack"
ADB3 ADB_1: "Header, 6-Pin"
ADB_2: "Header, 5-Pin, Dual row, Right Angle"
Boot: "Header, 4-Pin, Dual row"
"Bowler Debug": library part "RGB LED APTF1616SEEZGQBDC", "RGB LED"
C1 C2 C3 C5 C6 C7 C8 C9 C10 C11 C12 C13 C19 C23 C24 C25 C26 C27 C28 C29 C30 C31 C34 C35 C36 C37 C38 C39 C40 C41 C42 C43 C44 C45 C46 C47 C48 C49 C54 C55 C56 C57 C58 C59 C60 C61 C63 C64 C65 C66 C67 C68 C69 C70 C71 C72 C73: "Capacitor (Semiconductor SIM Model)"
C21 C22: "Polarized Capacitor (Surface Mount)"
C52 C53: "Polarized Capacitor (Radial)"
D1 D2: "Typical RED, GREEN, YELLOW, AMBER GaAs LED"
D10: library part Diode, "Default Diode"
DBGEN TRST: "Header, 2-Pin"
ISP: "Header, 3-Pin"
ISP_PGM RESET: library part "Mini Momemtary Switch"
J21: "6-pin socket"
J22: "Header, 10-Pin"
J23: "8-pin socket"
J24: "Header, 8-Pin"
R1 R3 R4 R5 R6 R7 R9 R10 R11 R12 R13 R14 R15 R16 R17 R18 R19 R20 R21 R22 R23 R24 R26 R27 R28 R29 R30 R31 R32 R33 R35 R36 R40 R41 R42 R43 R44 R45 R46 R47 R52 R55 R56 R57 R58 R60 R61 R62 R63 R64: "Resistor"
RA1 RA2: library part "EXB24V - Res Array x2"
RJ45: library part "Pulse RJ45_ICM_LED_Jack"
SSP0: "Header, 3-Pin, Dual row"
U1: "32-bit ARM Cortex-M4 MCU, 264 kB SRAM, 2 HS USB with on-chip PHY, Ethernet, CAN, AES, SPIFI, SGPIO, SCT, 144-Pin LQFP"
U2: "Voltage regulator"
U3: "3.3v Linear Regulator"
U4: library part "LAN8720 QFN"
U12: library part LM3526
USB0: library part "Micro USB", "Micro USB Jack B"
X3: "ABS07-32.768KHZ-T RTC Crystal Oscillator"

## Free pads (board coordinates)
  round 15 on Top Overlay: 0(2889,1800) 0(3234,923) 0(3985,1157)
  round 125 hole 125 unplated: ""(623.45,103.1) ""(623.45,2003.1) ""(2403.45,2003.1) ""(4403.45,303.1) ""(4403.45,1403.1)

## Via types
v1: diameter 25, hole 15, Top Layer Signals to Bottom Layer Signals, 226 vias
v2: diameter 50, hole 28, Top Layer Signals to Bottom Layer Signals, 15 vias
v3: diameter 25, hole 15, Top Layer Signals to Bottom Layer Signals, tented bottom, 1 vias

## Nets (pads, with @x,y where several pads share a name; then routed paths per layer and width w, separated by ;. In a path a pad name is that pad's centre, name@x,y a point inside that pad or via, vN(x,y) a via of type N, cw(c..) or ccw(c..) an arc to the next point about the centre after c; other vN are vias at no path point)
A4_SDA: J22.2 U1.93 | length 1495.1
  Top Layer Signals w6: U1.93@2642.04,607.69 U1.93@2643.21,608.87 2643.21,643.87 cw(c2646.34,643.87) 2646.34,646.99 ccw(c2646.34,650.12) 2646.34,653.24 cw(c2646.34,656.37) 2643.21,656.37 2643.21,746.87 cw(c2650.15,746.87) 2650.15,753.81 ccw(c2650.15,760.75) 2657.09,760.75 ccw(c2650.15,760.75) 2650.15,767.68 cw(c2650.15,774.62) 2643.21,774.62 2643.21,856.79 v1(2643,857)
  Bottom Layer Signals w6: v1(2643,857) 2609,891 2609,936.03 2638.47,965.5 2638.47,1094.47 2658,1114 2658,1251.89 2623,1286.89 2623,1366.38 2608,1381.38 2608,1885.8 2600.99,1892.81 2600.99,1958.99 J22.2@2645,2003
A5_SCL: J22.1 U1.92 | length 1496.2
  Top Layer Signals w6: v1(2619,831) 2623.53,826.47 2623.53,801.75 cw(c2616.59,801.75) 2616.59,794.81 ccw(c2616.59,787.87) 2609.65,787.87 ccw(c2616.59,787.87) 2616.59,780.94 cw(c2616.59,774) 2623.53,774 2623.53,666.87 cw(c2617.78,666.87) 2617.78,661.12 ccw(c2617.78,655.37) 2617.78,649.62 cw(c2617.78,643.87) 2623.53,643.87 U1.92@2623.53,608.87
  Bottom Layer Signals w6: J22.1@2545,2003 2588,1960 2588,1888.83 2596,1880.83 2596,1376.41 2611,1361.41 2611,1281.92 2646,1246.92 2646,1118.97 2626.47,1099.44 2626.47,970.47 2597,941 2597,886.03 2619,864.03 v1(2619,831)
ADB2: ADB_1.3 U1.86 | length 525.5
  Top Layer Signals w6: ADB_1.3@2504,103 2504,148 2481,171 2481,206.34 2500,225.34 2500,567.94 2505.42,573.36 U1.86@2505.42,608.87
ADB3: ADB_1.4 U1.85 | length 541.6
  Top Layer Signals w6: ADB_1.4@2404,103 2469,168 2469,211.31 2488,230.31 2488,568.38 2485.73,570.64 U1.85@2485.73,608.87
ADB3_0: ADB3.1 U1.46 | length 1770.7
  Top Layer Signals w6: v1(1990,1356) 1990,1337 1996,1331 1996,1291 2081.68,1205.32 U1.46@2164.87,1205.32
  Bottom Layer Signals w6: ADB3.1@1262,2003 1138,1879 1138,1443.85 1190.85,1391 1955,1391 v1(1990,1356)
ADB3_1: ADB3.2 U1.47 | length 1746.2
  Top Layer Signals w6: v1(1952,1358) 1984,1326 1984,1286.03 2084.39,1185.64 U1.47@2164.87,1185.64
  Bottom Layer Signals w6: ADB3.2@1162,2003 1162,1919.97 1126,1883.97 1126,1438.88 1185.88,1379 1931,1379 v1(1952,1358)
ADB3_2: ADB3.3 U1.48 | length 1767.7
  Top Layer Signals w6: v1(1959,1320) 1972,1307 1972,1281.06 2087.11,1165.95 U1.48@2164.87,1165.95
  Bottom Layer Signals w6: ADB3.3@1062,2003 1062,1940.91 1114,1888.91 1114,1433.91 1180.91,1367 1912,1367 v1(1959,1320)
ADB3_3: ADB3.4 U1.49 | length 1831.2
  Top Layer Signals w6: v1(1921,1327) 1960,1288 1960,1276.09 2089.82,1146.27 U1.49@2164.87,1146.27
  Bottom Layer Signals w6: ADB3.4@962,2003 997,1968 1017.94,1968 1102,1883.94 1102,1428.94 1175.94,1355 1893,1355 v1(1921,1327)
ADB3_4: ADB3.5 U1.51 | length 1942.9
  Top Layer Signals w6: v1(1926,1290) 1929.12,1290 2112.22,1106.9 U1.51@2164.87,1106.9
  Bottom Layer Signals w6: ADB3.5@862,2003 862,1998.97 904.97,1956 1012.97,1956 1090,1878.97 1090,1423.97 1170.97,1343 1872.41,1343 1925.41,1290 v1(1926,1290)
ADB3_5: ADB3.6 U1.52 | length 2048.7
  Top Layer Signals w6: v1(1887,1298) 1918,1267 1935.15,1267 2114.94,1087.21 U1.52@2164.87,1087.21
  Bottom Layer Signals w6: ADB3.6@762,2003 807.51,2003 866.51,1944 1008,1944 1078,1874 1078,1419 1166,1331 1854,1331 v1(1887,1298)
ADB4: ADB_1.5 U1.84 | length 604.5
  Top Layer Signals w6: ADB_1.5@2304,103 2343.72,103 2476,235.28 2476,561.97 2467,570.97 2467,607.91 U1.84@2466.05,608.87
ADB5: ADB_1.6 U1.83 | length 692.8
  Top Layer Signals w6: ADB_1.6@2204,103 2215,103 2265.53,153.53 2377.28,153.53 2464,240.25 2464,557 2446.36,574.64 U1.83@2446.36,608.87
ADB6: ADB_2.1 U1.73 | length 2418.2
  Top Layer Signals w6: v1(2247,553) 2247.15,553.15 U1.73@2247.15,608.87
  Bottom Layer Signals w6: v1(2247,553) 2247,528 2268,507 2337.06,507 2376.06,468 2395.09,468 2440.59,422.5 2725.5,422.5 2805,343 ; 2805.03,343 2815.03,333 3598.59,333 3668.59,403 4180,403 4215.47,438.47 4352.96,438.47 4398.49,484 ADB_2.1@4441,484
ADB7: ADB_2.2 U1.74 | length 2274
  Top Layer Signals w6: U1.74@2269.2,608.87 2269.2,566.8 2274,562 v1(2274,532)
  Bottom Layer Signals w6: v1(2274,532) 2276,532 2289,519 2342.03,519 2381.03,480 2400.06,480 2445.56,434.5 2730.5,434.5 2820,345 3593.62,345 3663.62,415 4175.03,415 4237.03,477 ADB_2.2@4337,477
ADB8: ADB_2.3 U1.78 | length 2348.5
  Top Layer Signals w6: U1.78@2347.94,608.87 2347.94,565.06 v1(2360,553)
  Bottom Layer Signals w6: v1(2360,553) 2360,518 2386,492 2405.03,492 2450.53,446.5 2740.5,446.5 2830,357 3588.65,357 3658.65,427 4170.06,427 4281.06,538 4398,538 4439,579 ADB_2.3@4439,594
ADB9: ADB_2.4 U1.79 | length 2200.4
  Top Layer Signals w6: U1.79@2367.62,608.87 2367.62,576.38 2386,558 v1(2386,532)
  Bottom Layer Signals w6: v1(2386,532) 2386,510 2392,504 2410,504 2455.5,458.5 2746.5,458.5 2826,379 2826.06,379 2836.06,369 3583.68,369 3653.68,439 4165.09,439 4290.59,564.5 4324.5,564.5 ADB_2.4@4324.5,580.5
ADB10: ADB_2.5 U1.95 | length 2042.5
  Top Layer Signals w6: U1.95@2682.58,608.87 2682.58,579.42 2712,550 v1(2712,511)
  Bottom Layer Signals w6: v1(2712,511) 2712,510 2728.5,493.5 2728.5,483.09 2741.09,470.5 2751.5,470.5 2831,391 ; 2831.03,391 2841.03,381 3578.7,381 3648.7,451 4160.12,451 4298.47,589.35 4298.47,600.47 4335,637 4397,637 4439,679 ADB_2.5@4439,694
ADB11: ADB_2.6 U1.97 | length 1912.5
  Top Layer Signals w6: U1.97@2721.95,608.87 2724,606.82 2724,532.59 2736,520.59 2736,506 v1(2750,492)
  Bottom Layer Signals w6: v1(2750,492) 2750,489 2846,393 3573.73,393 3643.73,463 4155.15,463 4286.47,594.32 4286.47,615.44 4329.51,658.48 4329.51,667.63 4339,677.12 ADB_2.6@4339,694
ADB12: ADB_2.7 U1.99 | length 2060
  Top Layer Signals w6: v1(2756,531) 2755,532 2755,561 2761.32,567.32 U1.99@2761.32,608.87 ; U1.99@2761,608.54 U1.99@2761.32,608.87 ; U1.99@2762.3,607.89 U1.99@2761.32,608.87
  Bottom Layer Signals w6: v1(2756,531) 2772.5,514.5 2772.5,484.53 2852.03,405 3568.76,405 3638.76,475 4150.18,475 4274.47,599.3 4274.47,691.47 4320,737 4398,737 4439,778 ADB_2.7@4439,794
ADB13: ADB_2.8 U1.100 | length 1929.9
  Top Layer Signals w6: U1.100@2781.01,608.87 2778.5,606.36 2778.5,527.5 v1(2794,512)
  Bottom Layer Signals w6: v1(2794,512) 2794,480 2857,417 3563.79,417 3633.79,487 4145.21,487 4262.47,604.27 4262.47,696.44 4270,703.97 4270,704.06 4339,773.06 ADB_2.8@4339,794
ADB14: ADB_2.9 U1.101 | length 2063.4
  Top Layer Signals w6: v1(2800,550) 2800.69,550.69 U1.101@2800.69,608.87
  Bottom Layer Signals w6: v1(2800,550) 2816,534 2816,475.59 2839.59,452 2839.94,452 2862.94,429 3558.82,429 3628.82,499 4140.24,499 4250.47,609.24 4250.47,744.96 4321.04,815.53 4375.53,815.53 ADB_2.9@4437,877 4439,879 ADB_2.9@4439,894
ADB15: ADB_2.10 U1.108 | length 1744.4
  Top Layer Signals w6: U1.108@2940.85,608.87 2940.85,573.15 2955,559 3072,559 3111,520 v1(3111,498)
  Bottom Layer Signals w6: v1(3111,498) 3132,477 3538.94,477 3608.94,547 4046,547 4086,587 4207.66,587 4238.47,617.81 4238.47,749.93 4337,848.46 ADB_2.10@4337,877
ADC0_0: R16.1 U1.144 U7.4 U7.5 | length 2178.3
  Top Layer Signals w6: U1.144@3023.13,1384.85 3062.15,1384.85 3072,1375 3381.85,1375 3552,1204.85 3552,551.85 3675.55,428.31 4158.69,428.31 4207,380 4207,352 4221,338 U7.5@4245.42,338 U7.4@4245.42,312.41 4245.42,264.58 4263.47,246.53 R16.1@4288,246.53
ADC0_1: R17.1 U1.143 U7.1 U7.2 | length 2137.9
  Top Layer Signals w6: U1.143@3023.13,1362.8 3377.08,1362.8 3540,1199.88 3540,546.88 3670.57,416.31 4144.69,416.31 4172.58,388.42 U7.1@4172.58,363.59 U7.2@4172.58,338 4197,338 4210,325 4210,266 4190.53,246.53 R17.1@4168,246.53
ADC0_2: R18.1 U1.142 U6.4 U6.5 | length 1935.8
  Top Layer Signals w6: U1.142@3023.13,1343.12 3063.12,1343.12 3070.8,1350.8 3372.11,1350.8 3528,1194.91 3528,541.91 3665.6,404.31 3920.69,404.31 3949,376 3949,348 3959,338 U6.5@3983.42,338 U6.4@3983.42,312.41 3983.42,253.58 3990.47,246.53 R18.1@4050,246.53
ADC0_3: R19.1 U1.139 U6.1 U6.2 | length 1815.2
  Top Layer Signals w6: U1.139@3023.13,1284.06 3023.2,1284 3066,1284 3094,1256 3449.94,1256 3516,1189.94 3516,536.94 3660.63,392.31 3893.69,392.31 3910.58,375.42 U6.1@3910.58,363.59 U6.2@3910.58,338 3935,338 3953,320 3953,269.53 R19.1@3931,247.53
ADC0_4: R20.1 U1.138 U8.4 U8.5 | length 1625.2
  Top Layer Signals w6: U1.138@3023.13,1264.38 3068.65,1264.38 3089.03,1244 3444.97,1244 3504,1184.97 3504,531.97 3655.97,380 3666.52,380 3680,366.52 3680,355 3697,338 U8.5@3719.42,338 U8.4@3719.42,312.41 3719.42,284.58 3755.47,248.53 R20.1@3807,248.53
ADC0_5: R21.1 U1.136 U8.1 U8.2 | length 1518.2
  Top Layer Signals w6: U1.136@3023.13,1225.01 3081.01,1225.01 3088,1232 3440,1232 3492,1180 3492,527 3646.58,372.42 U8.1@3646.58,363.59 U8.2@3646.58,338 3667,338 3691,314 R21.1@3691,249.53
AN0: J21.1 R16.2 | length 90.7
  Top Layer Signals w6: R16.2@4288,187.47 4288,163 4303,148 J21.1@4303,103
AN1: J21.2 R17.2 | length 105.7
  Top Layer Signals w6: R17.2@4168,187.47 4179.53,187.47 4203,164 J21.2@4203,103
AN2: J21.3 R18.2 | length 124.9
  Top Layer Signals w6: R18.2@4050,187.47 4081.53,187.47 4103,166 J21.3@4103,103
AN3: J21.4 R19.2 | length 138.5
  Top Layer Signals w6: R19.2@3931,188.47 3970.53,188.47 4003,156 J21.4@4003,103
AN4: J21.5 R20.2 | length 154.7
  Top Layer Signals w5: R20.2@3807,189.47 3855.53,189.47 3903,142 J21.5@3903,103
AN5: J21.6 R21.2 | length 170.5
  Top Layer Signals w6: R21.2@3691,190.47 3753.53,190.47 3803,141 J21.6@3803,103
ARDUINO_RESET: J24.3 U5.4 | length 446.7
  Top Layer Signals w6: J24.3@3104,103 3178.6,177.6 U5.4@3178.6,518.82
CS: SSP0.5 U1.124 | length 1353.5
  Top Layer Signals w6: U1.124@3023.13,988.79 3060.16,988.79 3074.94,974 3093.94,974 3154.94,913 3266,913 3276,923 v1(3296,923)
  Bottom Layer Signals w6: v1(3296,923) 3308.5,935.5 3366.53,935.5 3412.03,981 4210,981 4226,997 4302,997 SSP0.5@4308,1003
DBGEN: R55.1 U1.28 | length 845.8
  Top Layer Signals w6: R55.1@1690.53,1523 1690.53,1553.53 1740.5,1603.5 2307.5,1603.5 2406.99,1504.01 U1.28@2406.99,1467.13
DIO2: J23.3 U1.1 | length 1408.9
  Top Layer Signals w6: U1.1@2940.85,1490.88 U1.1@2940.85,1467.13 2964.6,1490.88 3152.88,1490.88 3311,1649 3311,1649.09 3577.91,1916 4017,1916 J23.3@4104,2003
DIO4: J23.5 U1.2 | length 1223.6
  Top Layer Signals w6: U1.2@2918.8,1467.13 2918.8,1495.22 2929.59,1506 3151,1506 3297,1652 3297,1652.06 3573.94,1929 3830,1929 J23.5@3904,2003
DIO7: J23.8 U1.6 | length 1024.5
  Top Layer Signals w6: U1.6@2840.06,1467.13 2840.06,1533.06 2891,1584 3093,1584 3512,2003 J23.8@3604,2003
DIO8: J22.10 U1.8 | length 921.9
  Top Layer Signals w6: U1.8@2800.69,1467.13 2800.69,1510.66 2886.03,1596 3088.03,1596 3446,1953.97 3446,2002 J22.10@3445,2003
DIO12: J22.6 U1.3 | length 810.8
  Top Layer Signals w6: v1(2899,1386) 2899,1467.02 U1.3@2899.12,1467.13
  Bottom Layer Signals w6: v1(2899,1386) 2909,1396 2995.97,1396 3021.5,1421.53 3021.5,1943.47 3020,1944.97 3020,1978 J22.6@3045,2003
DIO13: J22.5 U1.7 | length 853.4
  Top Layer Signals w6: U1.7@2820.38,1467.13 2820.38,1434.62 2842,1413 v1(2854,1413)
  Bottom Layer Signals w6: v1(2854,1413) 2859,1408 2991,1408 3009.5,1426.5 3009.5,1938.5 J22.5@2951,1997 ; J22.5@2945,2003 J22.5@2951,1997 ; J22.5@2958,1990 J22.5@2951,1997
ENET_CRS: R7.2 U1.64 | length 461.9
  Top Layer Signals w6: R7.2@1940.53,1117 1988,1069.53 v1(1988,980) ; v1(2070,851) 2082,839 2111.41,839 2123.4,850.99 U1.64@2164.87,850.99
  Bottom Layer Signals w6: v1(1988,980) 1988,869 2006,851 v1(2070,851)
ENET_FB1: FB8.2 RJ45.14 | length 144.4
  Top Layer Signals w20: FB8.2@479.62,1492 496,1492 508.25,1479.75 RJ45.14@508.25,1369.04
ENET_FB2: FB9.2 RJ45.13 | length 142.8
  Top Layer Signals w20: RJ45.13@494.08,748.96 575.04,668 FB9.2@603.38,668
ENET_MDC_NET: U1.75 U4.13 | length 1161.7
  Top Layer Signals w6: U4.13@1591.21,1149.74 1632.74,1149.74 1641,1158 v1(1779,1158) ; v1(2262,671) 2288.88,644.12 U1.75@2288.88,608.87
  Bottom Layer Signals w6: v1(1779,1158) 1860,1158 1897.5,1120.5 1897.5,1023.09 1927,993.59 1927,729 1986,670 v1@2262,670
ENET_MDIO: R22.1 U1.66 U4.12 | length 919.4
  Top Layer Signals w6: U4.12@1620.74,1120.21 1620.95,1120 1644,1120 1650.47,1126.47 R22.1@1680,1126.47 1685.53,1132 1846,1132 1860,1146 1970,1146 v1@2017.5,1098.5 ; U1.66@2164.87,811.62 2204.62,811.62 2221,828 2221,873 v1@2231,883
  Bottom Layer Signals w6: v1@2017,1099 2017,1047 2083,981 2199,981 2237,943 v1(2237,888)
  other v1: 2018,1099
ENET_RST: U1.38 U4.15 | length 762.6
  Top Layer Signals w6: U4.15@1551.84,1149.74 1552,1149.9 1552,1181 1560,1189 v1(1560,1195) ; v1(1701,1261) 1821,1381 2108,1381 2126.2,1362.8 U1.38@2164.87,1362.8 ; U1.38@2164.37,1363.3 2164.83,1363.33 U1.38@2188.87,1364.8
  Bottom Layer Signals w6: v1(1560,1195) 1606,1241 1681,1241 v1(1701,1261)
ENET_RXD_N: RA2.1 U1.62 | length 315.8
  Top Layer Signals w6: RA2.1@1888.5,983 1902,983 1994.64,890.36 2084.15,890.36 2085.39,891.6 2096.61,891.6 2097.85,890.36 U1.62@2164.87,890.36
ENET_RXD_P: RA2.3 U1.32 | length 1034.9
  Top Layer Signals w6: RA2.3@1888.5,955.44 1969.58,874.36 2091,874.36 v1(2103,861) ; v1(2263,1312) 2263,1367 2328.25,1432.25 U1.32@2328.25,1467.13
  Bottom Layer Signals w6: v1(2103,861) 2242,861 2263,882 v1(2263,1312)
ENET_TX_CLK: U1.68 U4.5 U10.4 | length 727.7
  Top Layer Signals w6: U4.5@1571.53,992.26 1571.53,965.61 U10.4@1732.74,804.4 1764.34,836 1868,836 1933.5,770.5 2163.11,770.5 U1.68@2164.87,772.25
ENET_TX_EN: R36.2 U1.34 | length 745.1
  Top Layer Signals w6: R36.2@1644.53,1264 1663.53,1283 1699,1283 1820,1404 2253.83,1404 2283.71,1433.88 2283.71,1461.96 U1.34@2288.88,1467.13 U1.34@2289,1467.25
ENET_TXD_N: RA1.3 U1.67 | length 737.4
  Top Layer Signals w6: RA1.3@1888.5,1211.44 1902,1211.44 1905.56,1215 1933.37,1215 1974.5,1173.87 1974.5,1160.44 1989.44,1145.5 2010.5,1145.5 v1(2018,1138) ; v1(1977,792) 1977.06,791.94 U1.67@2164.87,791.94
  Bottom Layer Signals w6: v1(1977,792) 1958,811 1958,1078 v1(2018,1138)
ENET_TXD_P: RA1.1 U1.70 | length 788.9
  Top Layer Signals w6: RA1.1@1888.5,1239 1902,1239 1910,1231 1940,1231 v1(2000,1171) ; v1(2013,733) 2131.88,733 2132,732.88 U1.70@2164.87,732.88
  Bottom Layer Signals w6: v1@2003,1168 2003,1159.06 1992.5,1148.56 1992.5,1135.13 1942,1084.63 1942,790.94 1966.44,766.5 1979.5,766.5 v1(2013,733)
FDTI_TX: ISP.1 U1.82 | length 1151.9
  Top Layer Signals w6: U1.82@2426.68,608.87 2426.68,647.32 2418,656 2418,726 2454,762 v1(2514,762)
  Bottom Layer Signals w6: v1(2514,762) 2515.5,763.5 3179.01,763.5 3195.04,747.47 3372.47,747.47 ISP.1@3411,786
FTDI_RX: ISP.2 U1.80 | length 1124.2
  Top Layer Signals w6: U1.80@2387,608.56 U1.80@2387.31,608.87 2387,609.17 2387,644 2374.5,656.5 2374.5,734.91 2387.09,747.5 2422.5,747.5 2459,784 v1(2489,784)
  Bottom Layer Signals w6: v1(2489,784) 3099,784 3142,827 3229,827 3272,784 ISP.2@3311,784